# Altium PCB CorgPassRev1.PcbDoc (part 2 of 2)
Units mm, origin at the board's own origin, x right, y up, seen from the top; angles counter-clockwise.
Board outline 25 x 75 mm, 4 copper layers (Top Layer, Plane (GND), Plane (3V3), Bottom Layer), stack 1.57 mm thick; 40 components, 42 nets, 191 pads, 69 vias.
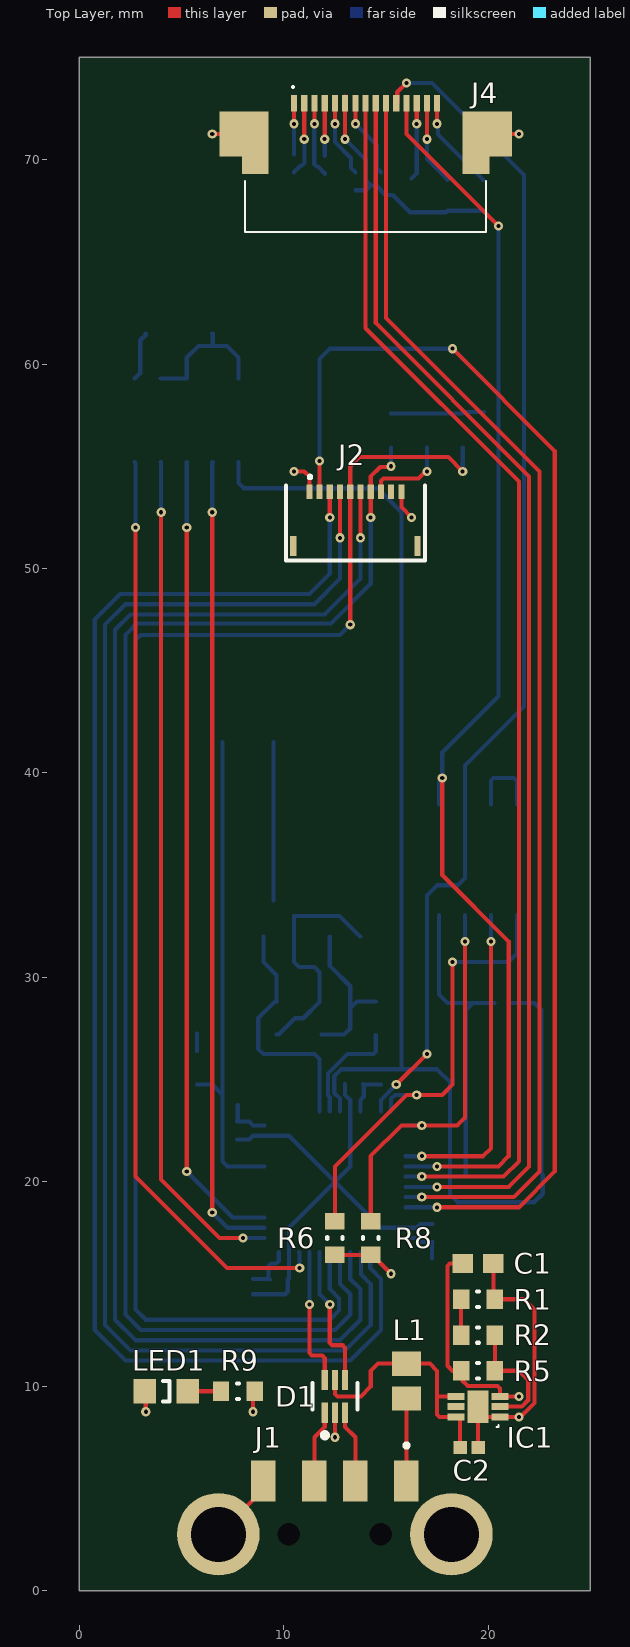
[diagram p0: Top Layer view]

## Via types
v1: diameter 0.45, hole 0.2, Top Layer to Bottom Layer, 46 vias
v2: diameter 0.45, hole 0.2, Plane (3V3) to Bottom Layer, 8 vias
v3: diameter 0.45, hole 0.2, Top Layer to Plane (GND), 6 vias
v4: diameter 0.45, hole 0.2, Plane (GND) to Bottom Layer, 5 vias
v5: diameter 0.45, hole 0.2, Top Layer to Plane (3V3), 4 vias

## Nets (pads, with @x,y where several pads share a name; then routed paths per layer and width w, separated by ;. In a path a pad name is that pad's centre, name@x,y a point inside that pad or via, vN(x,y) a via of type N, cw(c..) or ccw(c..) an arc to the next point about the centre after c; other vN are vias at no path point) (continued)
GND: (continued)
  Bottom Layer w0.204: J3.3 J3.5 5.25,60.31 5.824,60.884 6.52,60.884 ; R10.2 v4(5.75,27.25) ; v4(6.5,61.5) 6.52,61.48 6.52,60.884 ; C3.1 8.31,22.06 8.5,22.25 IC3.47 10.25,22.25 IC3.49 ; J3.9 7.79,60.31 7.216,60.884 6.52,60.884 ; v4(8.5,14.5) 10.071,14.5 10.19,14.62 C6.2 10.25,15.283 IC3.35 10.25,17.75 IC3.49 ; Y1.4 9.75,27.2 10.55,28 10.95,28 11.75,28.8 11.75,30.25 11.5,30.5 10.75,30.5 10.5,30.75 C5.1 v4(10.5,33) 12.725,33 13.725,32 C4.1 ; C11.1 13,24.25 13.25,24 IC3.8 13.25,20.75 IC3.49 ; v1(13,71) 14.014,69.986 14.014,68.966 14.251,68.728 ; C10.1@13.5,68.52 C10.1 14.023,68.5 14.251,68.728 ; C14.2 16.69,17.94 16.5,17.75 IC3.23 14.75,17.75 IC3.49 ; IC2.4 v4(17.595,29.155) 18,28.75 19.25,28.75 ; S2.2 S2.1 18.9,28.4 19.25,28.75 ; C12.1 C13.2 17.925,67.425 R11.1 16.175,67.425 15.328,68.272 14.958,68.272 14.75,68.48 C9.1 14.75,68.52 14.542,68.728 14.251,68.728 ; C15.2 19.25,28.75
NetC4_2: C4.2 R7.1 Y1.3 | length 7.8
  Bottom Layer w0.204: Y1.3 12.95,27.2 13.25,27.5 13.25,28.5 ; C4.2 12.25,30.563 13.25,29.563 13.25,28.5 ; R7.1 13.575,28.825 13.25,28.5
NetC5_2: C5.2 IC3.5 Y1.1 | length 12
  Bottom Layer w0.204: C5.2 9,30.75 9.65,30.1 Y1.1 9.55,28.8 8.746,27.996 8.746,26.504 9,26.25 11.5,26.25 11.75,26 IC3.5
NetC7_1: C7.1 J4.2 | length 3.6
  Top Layer w0.204: v1(11,71) J4.2
  Bottom Layer w0.204: C7.1 10.5,69.39 10.826,69.716 10.894,69.716 11.014,69.836 11.014,70.986 v1(11,71)
NetC7_2: C7.2 J4.1 | length 2.5
  Top Layer w0.204: v1(10.5,71.75) J4.1
  Bottom Layer w0.204: C7.2 v1(10.5,71.75)
NetC8_1: C8.1 J4.3 | length 3.7
  Top Layer w0.204: v1(11.5,71.75) J4.3
  Bottom Layer w0.204: v1(11.5,71.75) 11.486,71.736 11.486,69.776 11.606,69.656 11.674,69.656 12,69.33 C8.1
NetC8_2: C8.2 J4.4 | length 2.6
  Top Layer w0.204: v1(12,71) J4.4
  Bottom Layer w0.204: C8.2 v1(12,71)
NetC12_2: C12.2 J4.15 | length 4.7
  Top Layer w0.204: v1(17.5,71.75) J4.15
  Bottom Layer w0.204: v1(17.5,71.75) 17.547,71.703 17.547,71.228 19.75,69.025 C12.2
NetC13_1: C13.1 J4.14 | length 4.2
  Top Layer w0.204: v1(17,71) J4.14
  Bottom Layer w0.204: v1(17,71) 17,70.025 18,69.025 C13.1
NetC15_1: C15.1 IC3.7 J3.10 S2.3 S2.4 | length 65.7
  Bottom Layer w0.204: J3.10 7.79,54.19 8.058,53.922 14.578,53.922 15.75,52.75 15.75,25.5 ; IC3.7 12.75,24.068 12.466,24.351 12.466,25.171 12.795,25.5 15.75,25.5 ; C15.1 22.25,28.75 22.6,28.4 S2.3 S2.4 22.666,20.334 22.666,19.416 22.25,19 18.5,19 18.125,19.375 18.125,24.875 17.5,25.5 15.75,25.5
NetD1_1: D1.1 J1.3 | length 3.5
  Top Layer w0.204: J1.3 11.5,7.5 12,8 D1.1
NetD1_3: D1.3 J1.2 | length 3.5
  Top Layer w0.204: D1.3 13,8 13.5,7.5 J1.2
NetD1_4: D1.4 IC3.32 | length 7.1
  Top Layer w0.204: v1(12.25,14) 12.25,12.12 12.37,12 12.88,12 13,11.88 D1.4
  Bottom Layer w0.204: IC3.32 11.75,14.5 v1(12.25,14)
NetD1_6: D1.6 IC3.33 | length 6.9
  Top Layer w0.204: v1(11.25,14) 11.25,11.62 11.37,11.5 11.88,11.5 12,11.38 D1.6
  Bottom Layer w0.204: v1(11.25,14) IC3.33
NetIC1_2: IC1.2 R2.1 R5.2 | length 6.1
  Top Layer w0.204: R2.1 R5.2 21.498,10.752 21.954,10.296 21.954,9.312 21.642,9 IC1.2
NetIC2_1: IC2.1 IC3.12 R6.1 | length 23.2
  Top Layer w0.204: R6.1 12.5,20.75 16,24.25 v1(16.5,24.25) 17.75,24.25 18.25,24.75 v1(18.25,30.75)
  Bottom Layer w0.204: IC3.12 15.25,24.068 15.432,24.25 v1(16.5,24.25) ; v1(18.25,30.75) 21,30.75 21.416,31.166 21.416,31.766 21.405,31.777 IC2.1
NetIC2_2: IC2.2 IC3.16 | length 15.7
  Top Layer w0.204: v1(16.75,21.25) 19.75,21.25 20.135,21.635 v1(20.135,31.75)
  Bottom Layer w0.204: IC3.16 v1(16.75,21.25) ; v1(20.135,31.75) IC2.2
NetIC2_3: IC2.3 IC3.13 R8.2 | length 19.3
  Top Layer w0.204: R8.2 14.25,21.25 15.75,22.75 v1(16.75,22.75) 18.48,22.75 18.865,23.135 v1(18.865,31.75)
  Bottom Layer w0.204: IC3.13 v1(16.75,22.75) ; v1(18.865,31.75) IC2.3
NetIC2_5: IC2.5 IC3.17 J4.12 | length 62.5
  Top Layer w0.204: J4.12 16,71.25 v1(20.5,66.75) ; v1(17.5,20.75) 20.5,20.75 21,21.25 21,31.75 17.75,35 v1(17.75,39.75)
  Bottom Layer w0.204: IC3.17 v1(17.5,20.75) ; IC2.5 17.595,39.528 17.75,39.683 v1(17.75,39.75) 17.75,41 20.5,43.75 v1(20.5,66.75)
NetIC2_6: IC2.6 IC3.11 J4.11 | length 58.1
  Top Layer w0.204: v1(15.5,24.75) v1(17,26.25) ; J4.11 15.548,72.798 15.548,73.298 v1(16,73.75)
  Bottom Layer w0.204: IC3.11 14.75,24 v1(15.5,24.75) ; v1(16,73.75) 17.25,73.75 21.75,69.25 21.75,43.25 18.865,40.365 IC2.6 18.865,34.865 18.5,34.5 17.5,34.5 17,34 v1(17,26.25)
NetIC3_6: IC3.6 R7.2 | length 5.5
  Bottom Layer w0.204: IC3.6 12.25,24.136 12.161,24.225 12.161,25.298 13.113,26.25 14.38,26.25 14.5,26.37 R7.2
NetIC3_18: IC3.18 J4.8 | length 60.7
  Top Layer w0.204: J4.8 14,61.75 21.5,54.25 21.5,21 20.75,20.25 v1(16.75,20.25)
  Bottom Layer w0.204: IC3.18 v1(16.75,20.25)
NetIC3_19: IC3.19 J4.9 | length 61.6
  Top Layer w0.204: J4.9 14.5,62 22,54.5 22,20.75 21,19.75 v1(17.5,19.75)
  Bottom Layer w0.204: IC3.19 v1(17.5,19.75)
NetIC3_20: IC3.20 J4.10 | length 62.4
  Top Layer w0.204: J4.10 15,62.25 22.5,54.75 22.5,20.5 21.25,19.25 v1(16.75,19.25)
  Bottom Layer w0.204: IC3.20 v1(16.75,19.25)
NetIC3_21: IC3.21 J2.2 | length 63.6
  Top Layer w0.204: J2.2 v1(11.75,55.25) ; v1(17.5,18.75) 21.5,18.75 23.25,20.5 23.25,55.75 v1(18.25,60.75)
  Bottom Layer w0.204: v1(11.75,55.25) 11.75,60.25 12.25,60.75 v1(18.25,60.75) ; IC3.21 v1(17.5,18.75)
NetIC3_27: IC3.27 J2.3 | length 70.4
  Top Layer w0.204: v1(12.25,52.5) J2.3
  Bottom Layer w0.204: v1(12.25,52.5) 12.25,49.75 11.25,48.75 2,48.75 0.75,47.5 0.75,12.75 2.25,11.25 13.25,11.25 14.75,12.75 14.75,15.25 14.229,15.771 14.229,16.529 IC3.27
NetIC3_28: IC3.28 J2.4 | length 68.7
  Top Layer w0.204: v1(12.75,51.5) J2.4
  Bottom Layer w0.204: v1(12.75,51.5) 12.75,49.5 11.5,48.25 2.25,48.25 1.25,47.25 1.25,13 2.5,11.75 13,11.75 14.25,13 14.25,15 13.775,15.475 13.775,16.525 IC3.28
NetIC3_29: IC3.29 J2.6 | length 67.4
  Top Layer w0.204: v1(13.75,51.5) J2.6
  Bottom Layer w0.204: IC3.29 13.25,15.25 13.75,14.75 13.75,13.25 12.75,12.25 2.75,12.25 1.75,13.25 1.75,47 2.5,47.75 12,47.75 13.75,49.5 v1(13.75,51.5)
NetIC3_30: IC3.30 J2.7 R3.2 | length 68.5
  Top Layer w0.204: v1(14.25,52.5) J2.7 14.25,54.5 14.719,54.969 15.219,54.969 v1(15.25,55)
  Bottom Layer w0.204: IC3.30 12.75,15 13.25,14.5 13.25,13.5 12.5,12.75 3,12.75 2.25,13.5 2.25,46.75 2.807,47.307 12.307,47.307 14.25,49.25 v1(14.25,52.5) ; v1(15.25,55) R3.2
NetIC3_31: IC3.31 J2.5 R4.2 | length 71.8
  Top Layer w0.204: v1(13.25,47.25) J2.5 13.25,55 13.704,55.454 18.046,55.454 v1(18.75,54.75)
  Bottom Layer w0.204: IC3.31 12.25,14.75 12.704,14.296 12.704,13.704 12.25,13.25 3.25,13.25 2.75,13.75 2.75,46.5 3,46.75 12.75,46.75 v1(13.25,47.25) ; v1(18.75,54.75) R4.2
NetIC3_34: IC3.34 J3.2 | length 45.6
  Top Layer w0.204: v1(2.75,52) 2.75,20.25 7.225,15.775 v1(10.776,15.775)
  Bottom Layer w0.204: J3.2 2.75,55.175 v1(2.75,52) ; IC3.34 10.763,16.537 10.763,15.788 v1(10.776,15.775)
NetIC3_37: IC3.37 J3.4 | length 41.3
  Top Layer w0.204: v1(4,52.75) 4,20.108 6.858,17.25 v1(8,17.25)
  Bottom Layer w0.204: J3.4 4,55.195 v1(4,52.75) ; v1(8,17.25) IC3.37
NetIC3_38: IC3.38 J3.8 | length 39.6
  Top Layer w0.204: v1(6.5,18.5) v1(6.5,52.75)
  Bottom Layer w0.204: v1(6.5,18.5) 7.25,17.75 IC3.38 ; v1(6.5,52.75) 6.5,55.195 J3.8
NetIC3_39: IC3.39 J3.6 | length 39.4
  Top Layer w0.204: v1(5.25,20.5) v1(5.25,52)
  Bottom Layer w0.204: v1(5.25,20.5) 7.5,18.25 IC3.39 ; v1(5.25,52) J3.6
NetIC3_44: IC3.44 R10.1 S1.2 S1.5 | length 24.1
  Bottom Layer w0.204: R10.1 6.5,24.75 7,24.25 ; S1.2 S1.5 7,24.25 ; IC3.44 7.25,20.75 7,21 7,24.25
NetJ1_1: J1.1 L1.2 | length 4
  Top Layer w0.204: J1.1 L1.2
NetJ2_8: J2.8 R?.2 | length 4.2
  Top Layer w0.204: J2.8 14.75,54.286 14.87,54.406 16.593,54.406 16.937,54.75 v1(17,54.75)
  Bottom Layer w0.204: v1(17,54.75) R?.2
NetJ4_13: J4.13 R11.2 | length 3.8
  Top Layer w0.204: v1(16.5,71.75) J4.13
  Bottom Layer w0.204: R11.2 16.5,69.325 v1(16.5,71.75)
NetLED1_1: LED1.1 R9.2 | length 1.6
  Top Layer w0.204: LED1.1 R9.2
NetR1_1: R1.1 R2.2 | length 1.7
  Top Layer w0.204: R2.2 R1.1
pads on no net: IC1.5 IC3.1 IC3.2 IC3.3 IC3.4 IC3.10 IC3.14 IC3.15 IC3.22 IC3.25 IC3.26 IC3.40 IC3.41 IC3.42 IC3.43 IC3.45 IC3.46 J1.MH3 J1.MH4 J2.9 J2.11 J2.12 J3.7 S1.3 S1.6

## Polygon pours and split planes (outlines as drawn)
3V3 on Plane (3V3) "3V3_L03_P001" (solid, pour order 1): -6.5,78 -3,74.5 -3,-4.5 -2.5,-4 34.5,-4 34.5,80 36,81.5 -5,81.5 -7,79.5
GND on Plane (GND) "GND_L02_P000" (solid, pour order 0): -12,62.5 -14,60.5 -14,-2.5 35,-2.5 35.5,-2 32.5,1 32.5,82 -9,82 -11,84 -12,83 -12,72 -16.5,67.5 -16.5,67

## Silkscreen, mask and mechanical layers (free items; w line width, h text height)
Top Component Center:
  rectangle: 1.5,14.75 16.5,29.75